# Altium PCB Controller-Board.PcbDoc
Units mil, origin at the board's own origin, x right, y up, seen from the top; angles counter-clockwise.
Board outline 1377.95 x 1181.1 mil, 2 copper layers (Component Side, Bottom Layer), stack 12.8 mil thick; 36 components, 50 nets, 202 pads, 55 vias.
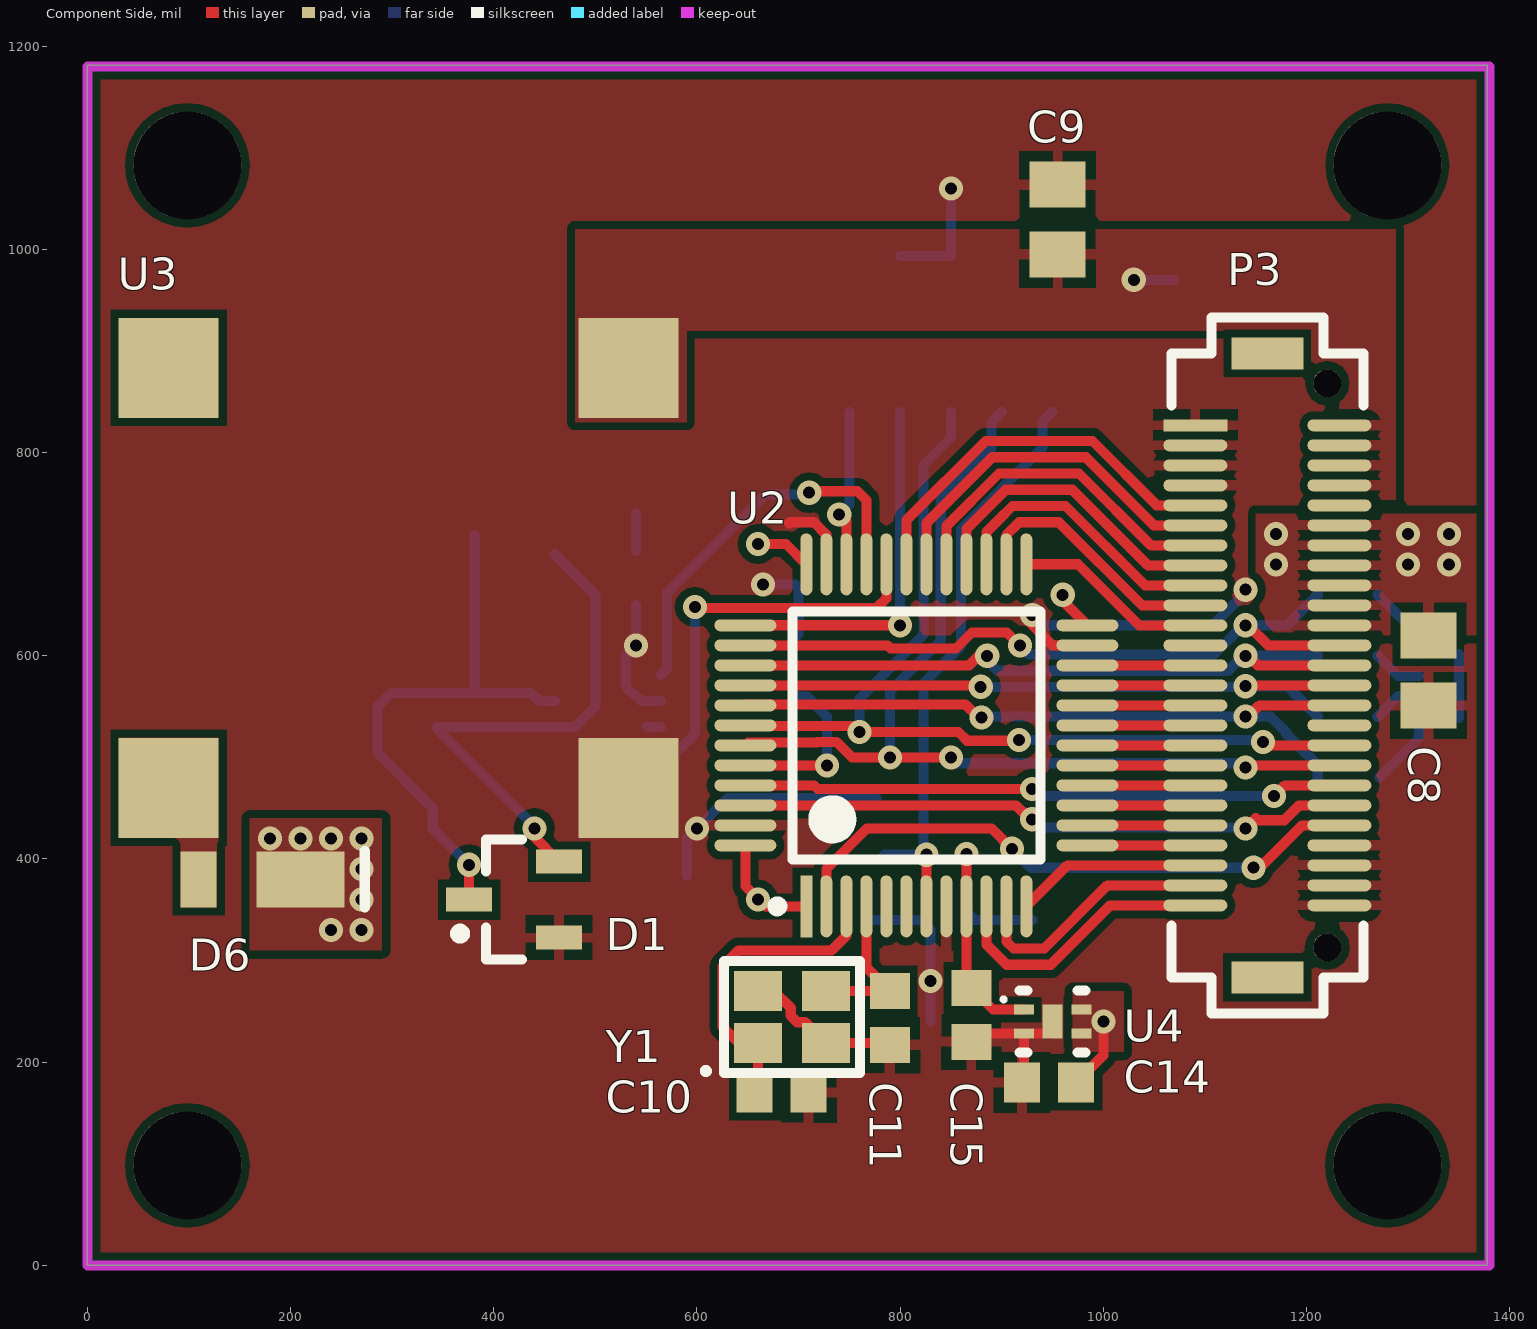
[diagram p0: Component Side view]
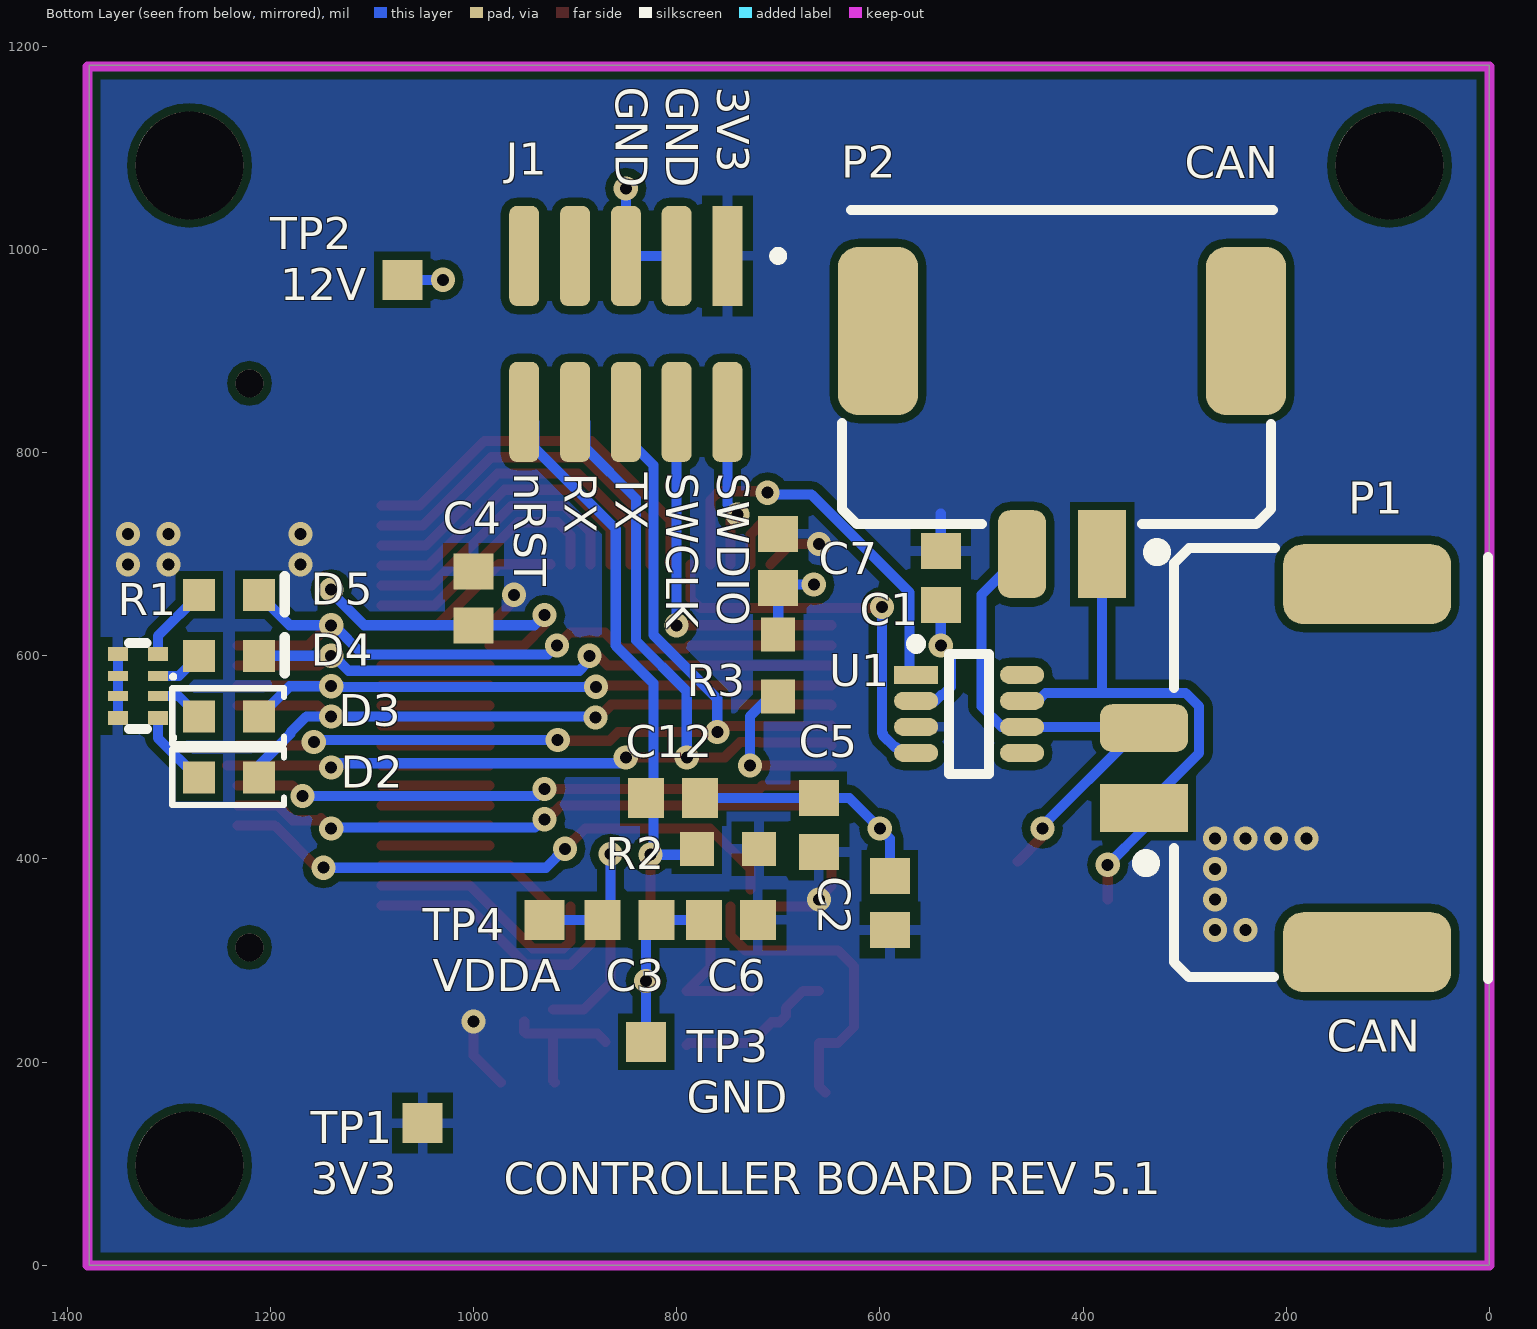
[diagram p1: Bottom Layer view, seen from below]
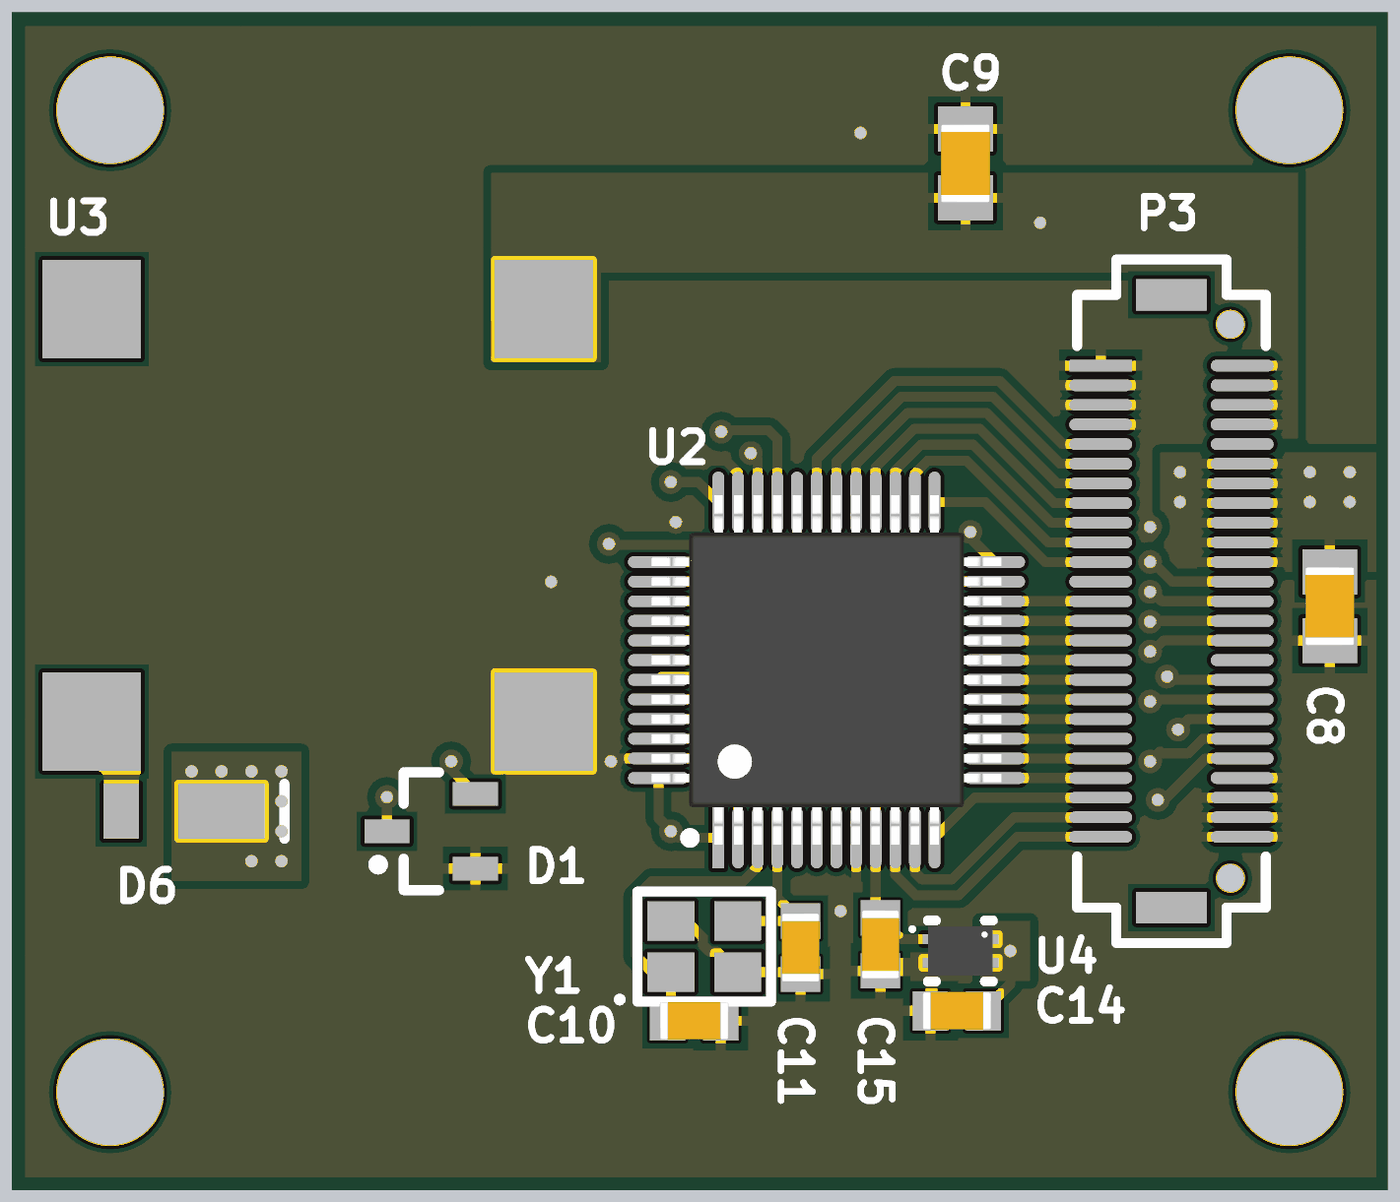
[diagram p2: 3D render of the assembled board from above, using the file's embedded part models]
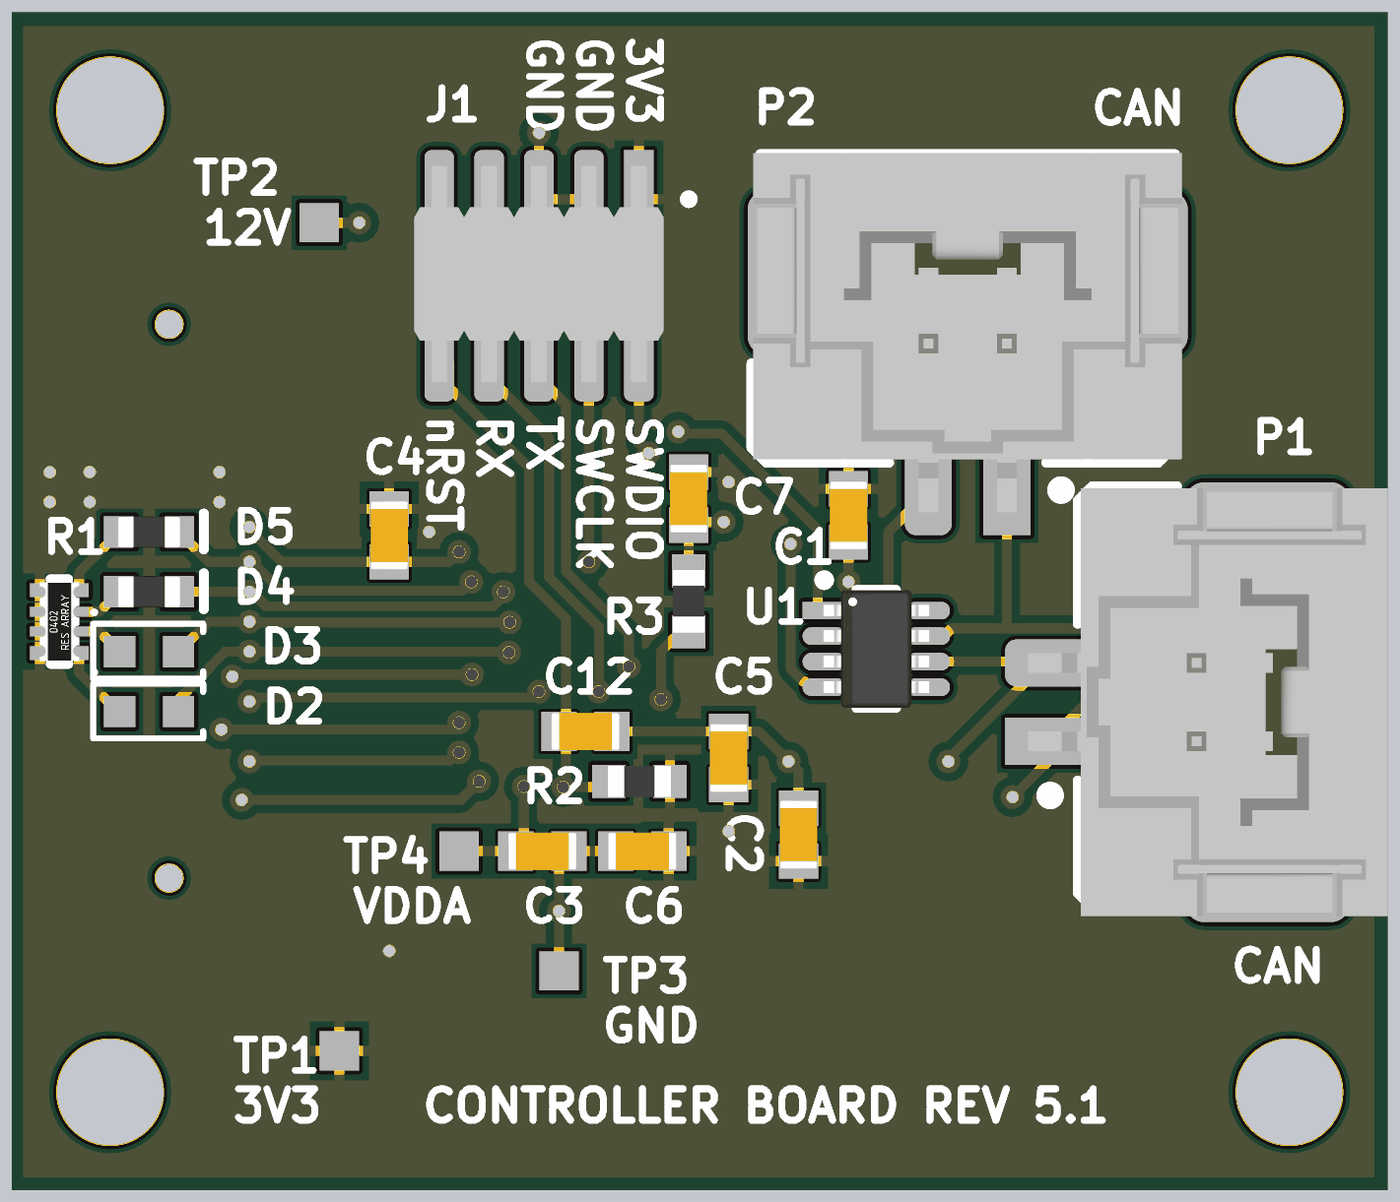
[diagram p3: 3D render of the assembled board from below, using the file's embedded part models]

## Layer stack, top to bottom
Top Solder: solder mask 0.4, Solder Resist, Dk 3.5
Component Side: signal copper 1.4
Dielectric 1: core 10, FR-4, Dk 4.2
Bottom Layer: signal copper 1.4
Solder Side: solder mask 0.4, Solder Resist, Dk 3.5

## Board outline
0,0 1377.95,0 1377.95,1181.1 0,1181.1

## Design rules (kind name [scope] priority, off if disabled: settings)
Clearance [All] p1: gap=6 except(5.98: Track-Track; 7.87: Arc-Poly Track-Poly SMDPad-Poly THPad-Poly Via-Poly Fill-Poly Poly-Poly Poly-Region Poly-Text)
DiffPairsRouting [All] p1: maxlimit=10 minlimit=10 mostfreqgap=10 toplayer_minwidth=10 toplayer_maxwidth=15 toplayer_prefwidth=10 bottomlayer_minwidth=10 bottomlayer_maxwidth=15 bottomlayer_prefwidth=10 maxuncoupledlength=984.25
HoleSize [All] p1: absolutevalues=TRUE maxlimit=118.11 minlimit=1 maxpercent=80.000 minpercent=20.000
MinimumSolderMaskSliver [All] p1: minsoldermaskwidth=0
PlaneClearance [All] p1: clearance=15.75
PlaneConnect [All] p1: planeconnectstyle=Direct reliefexpansion=0 reliefentries=4 reliefconductorwidth=10 reliefairgap=10
PolygonConnect PolygonConnect_LDO [HasFootprint('IC REG LDO 3V 0.2A 4-TDFN') OR HasFootprint('DIODE SCHOTTKY 30V 1A POWERDI123')OR HasFootprint('IC DCDC 3.3V 0.5A 4-SMD')] p1: connectstyle=Direct reliefconductorwidth=10 reliefentries=4 polygonreliefangle="90 Angle" airgapwidth=10
PolygonConnect [IsPad] p2: connectstyle=Relief reliefconductorwidth=10 reliefentries=4 polygonreliefangle="90 Angle" airgapwidth=10
PolygonConnect PolygonConnect_Via [Not(IsPad)] p3: connectstyle=Direct reliefconductorwidth=10 reliefentries=4 polygonreliefangle="90 Angle" airgapwidth=10
RoutingVias [All] p1: holewidth=11.81 width=23.81 viastyle="Through Hole" minholewidth=11.81 minwidth=23.81 maxholewidth=248.03 maxwidth=260.03
SilkToSilkClearance [All] p1: silktosilkclearance=5.91
SilkToSolderMaskClearance [IsPad] p1: minsilkscreentomaskgap=5.91 clearancetoexposedcopper=TRUE
SolderMaskExpansion [All] p1: expansion=4
Width [All] p1: maxlimit=50 minlimit=6 preferedwidth=8
23 further rules are at their usual default settings.

## Classes and differential pairs
component class Controller_Board_Power_Supply: C14 C15 D6 TP1 TP2 TP3 TP4 U3 U4 VIN
component class Controller_Board_Main: C1 C2 C3 C4 C5 C6 C7 C8 C9 C10 C11 C12 D1 D2 D3 D4 D5 J1 P1 P2 P3 R1 R2 R3 U1 U2 Y1
differential pair CAN: +CAN_P -CAN_N

## Components (designator, comment, footprint, x,y, rotation, side; value= is the part's Value field where it differs from the comment)
C1 "CAP CER 4.7UF 25V 10% X5R 0603" "CAP, 0603" 540,676.57 r90 bottom
C2 "CAP CER 0.1UF 50V 10% X7R 0603" "CAP, 0603" 590,356.57 r270 bottom
C3 "CAP CER 0.1UF 50V 10% X7R 0603" "CAP, 0603" 846.57,340 r0 bottom
C4 "CAP CER 0.1UF 50V 10% X7R 0603" "CAP, 0603" 1000,656.57 r90 bottom
C5 "CAP CER 0.1UF 50V 10% X7R 0603" "CAP, 0603" 660,433.43 r270 bottom
C6 "CAP CER 0.1UF 50V 10% X7R 0603" "CAP, 0603" 746.57,340 r180 bottom
C7 "CAP CER 0.1UF 50V 10% X7R 0603" "CAP, 0603" 700,693.43 r90 bottom
C8 "CAP CER 10uF 25V 10% X5R 0805" "CAP, 0805" 1320,585.55 r270 top
C9 "CAP CER 10uF 25V 10% X5R 0805" "CAP, 0805" 955,1029.45 r90 top
C10 "CAP CER 15PF 50V ±5% NPO 0603" "CAP, 0603" 683.43,170 r180 top
C11 "CAP CER 15PF 50V ±5% NPO 0603" "CAP, 0603" 790,243.43 r90 top
C12 "CAP CER 0.1UF 50V 10% X7R 0603" "CAP, 0603" 803.43,460 r0 bottom
C14 "CAP CER 1UF 50V 10% X7R 0603" "CAP, 0603" 946.57,180 r180 top
C15 "CAP CER 1UF 50V 10% X7R 0603" "CAP, 0603" 870,246.57 r270 top
D1 "DIODE TVS 24VWM 70VC SOT23" SOT23 420,360 r180 top
D2 "LED BLUE CLEAR 2.8V 0603" DIOC1608X06N 1240.47,480 r180 bottom
D3 "LED BLUE CLEAR 2.8V 0603" DIOC1608X06N 1240.47,540 r180 bottom
D4 "LED GREEN CLEAR 2V 0603" LED_0603 1268.03,599.61 r180 bottom
D5 "LED RED CLEAR 2V 0603" LED_0603 1268.03,659.61 r180 bottom
D6 "DIODE SCHOTTKY 30V 1A POWERDI123" "DIODE SCHOTTKY 30V 1A POWERDI123" 109.61,380 r0 top
J1 "CONN 10POS HEADR MALE 0.05\"" "CONN, 10POS 0.05\" Debug Header" 750,993.54 r0 bottom
P1 "Dura-Clik" "CONN, 2POS Dura-Click Vertical" 340,450 r90 bottom
P2 "Dura-Clik" "CONN, 2POS Dura-Click Vertical" 381.26,700 r0 bottom
P3 "CONN 50POS Bergstak Receptacle 0.02\"" "CONN, Bergstak 50 Pos Receptacle" 1161.42,590.55 r0 top locked
R1 "RES ARRAY 510 OHM 5% 4RES" "RES ARRAY 4 POS 0804" 1369.69,580 r0 bottom
R2 "RES 100K OHM 5% 1/8W 0603" "RES, 0603" 749.49,410 r180 bottom
R3 "RES 510 OHM 5% 1/10W 0603" "RES, 0603" 700,590.51 r270 bottom
TP1 "Test Point" "Test Point" 1050,140 r90 bottom
TP2 "Test Point" "Test Point" 1070,970 r90 bottom
TP3 "Test Point" "Test Point" 830,220 r90 bottom
TP4 "Test Point" "Test Point" 930,340 r90 bottom
U1 "IC CAN Tranceiver TCAN332DR" TSOP65P280X145-8N 512.17,542.8 r180 bottom
U2 "IC MCU 32BIT 128KB FLASH 48LQFP" TSQFP50P890X890X160-48M 815.94,521.65 r90 top locked
U3 "IC DCDC 3.3V 0.5A 4-SMD" "IC DCDC 3.3V 0.5A 4-SMD" 532.76,883.39 r270 top
U4 "IC REG LDO 3V 0.2A 4-TDFN" "IC REG LDO 3V 0.2A 4-TDFN" 921.85,251.81 r270 top
Y1 "CRYSTAL 32 MHz 8pF 4-SMD" "CX2520DB CRYSTAL" 660,218.82 r0 top

## Footprints (in the part's own frame and the unit in brackets; to place one, negate y for a bottom-side part, rotate by r counter-clockwise, add the part's x,y. Pads: shape width x height; smd on the part's side, far side on the other; paste and mask are expansions set on the pad)
"CAP, 0603" [mm] "Chip Capacitor, 2-Leads, Body 1.60x0.81mm, IPC Medium Density"
  rect 0.9x1 smd mask+0.076: 1(-0.675,0) 2(0.675,0)
  body extent -0.87,-0.48 0.88,0.48, height 0.9
"CAP, 0805" [mm] "Chip Capacitor, 2-Leads, Body 2.00x1.25mm, IPC Medium Density"
  rect 1.15x1.4 smd: 1(-0.875,0) 2(0.875,0)
  body extent -1,-0.63 1,0.63, height 1.25
"CONN, 2POS Dura-Click Vertical" [mm] "WM7169CT-ND"
  rect 1.2x2.2 smd: 1(0,0)
  rrect50% 1.2x2.2 smd: 2(2,0)
  rrect50% 2x4.2 smd: 3(-3.6,-5.58) 3(5.6,-5.58)
  silkscreen extent -4.28,-8.6 6.5,0.05, body extent -4.45,-8.64 6.45,0.51, height 8
"CONN, 10POS 0.05\" Debug Header" [mm] "Amphenol 10 Positions Header Connector 0.050\" (1.27mm) Surface Mount Gold"
  rect 0.75x2.5 smd: 1(0,0)
  rrect50% 0.75x2.5 smd: 2(0,3.9) 3(1.27,0) 4(1.27,3.9) 5(2.54,0) 6(2.54,3.9) 7(3.81,0) 8(3.81,3.9) 9(5.08,0) 10(5.08,3.9)
  silkscreen extent -1.37,-0.1 -1.17,0.1, body extent -0.63,-0.85 5.72,4.65, height 4.5
"CONN, Bergstak 50 Pos Receptacle" [mm] "Bergstak 50 Position Receptacle"
  rect 1.6x0.3 smd: 1(-1.8,6)
  oval 1.6x0.3 smd: 2(-1.8,5.5) 3(-1.8,5) 4(-1.8,4.5) 5(-1.8,4) 6(-1.8,3.5) 7(-1.8,3) 8(-1.8,2.5) 9(-1.8,2) 10(-1.8,1.5) 11(-1.8,1) 12(-1.8,0.5) 13(-1.8,0) 14(-1.8,-0.5) 15(-1.8,-1) 16(-1.8,-1.5) 17(-1.8,-2) 18(-1.8,-2.5) 19(-1.8,-3) 20(-1.8,-3.5) 21(-1.8,-4) 22(-1.8,-4.5) 23(-1.8,-5) 24(-1.8,-5.5) 25(-1.8,-6) 26(1.8,-6) 27(1.8,-5.5) 28(1.8,-5) 29(1.8,-4.5) 30(1.8,-4) 31(1.8,-3.5) 32(1.8,-3) 33(1.8,-2.5) 34(1.8,-2) 35(1.8,-1.5) 36(1.8,-1) 37(1.8,-0.5) 38(1.8,0) 39(1.8,0.5) 40(1.8,1) 41(1.8,1.5) 42(1.8,2) 43(1.8,2.5) 44(1.8,3) 45(1.8,3.5) 46(1.8,4) 47(1.8,4.5) 48(1.8,5) 49(1.8,5.5) 50(1.8,6)
  rect 1.8x0.8 smd: ""(0,-7.8) ""(0,7.8)
  round 0.7 hole 0.7: ""(1.5,-7.05) ""(1.5,7.05)
  silkscreen extent -2.4,-8.7 2.4,8.7
"CX2520DB CRYSTAL" [mm]
  rect 1.2x1 smd: 1(0,0) 2(1.7,0) 3(1.7,1.3) 4(0,1.3)
  silkscreen extent -1.35,-0.75 2.55,2.05, body extent -0.4,-0.35 2.1,1.65, height 0.5
DIOC1608X06N [mm] "Chip Diode, 2-Leads, Body 1.60x0.80mm, IPC Medium Density"
  rect 0.8x0.8 smd: 1(-0.75,0) 2(0.75,0)
  silkscreen extent -1.45,-0.69 1.38,1.05, body extent -0.8,-0.4 0.8,0.4, height 0.8
"DIODE SCHOTTKY 30V 1A POWERDI123" [mm] "Diodes Incorporated DFLS130L-7"
  rect 0.9x1.4 smd: 1(0,0)
  rect 2.2x1.4 smd: 2(2.55,0)
  silkscreen extent 4.15,-0.7 4.15,0.7, body extent 0.1,-1 3.1,1, height 1
"IC DCDC 3.3V 0.5A 4-SMD" [mm] "ROF-78E3.3-0.5SMD-R"
  rect 2.5x2.5 smd: 1(0,0) 2(10.5,0) 3(10.5,-11.5) 4(0,-11.5)
  body extent -1,-12.5 11.5,1, height 4
"IC REG LDO 3V 0.2A 4-TDFN" [mm] "QFN, 4-Leads, Body 1.20x1.60mm, Pitch 0.50mm/1.40mm, Thermal Pad 0.86x0.50mm, IPC Medium Density"
  rect 0.25x0.5 smd: 1(0,0) 2(0.6,0) 3(0.6,1.44) 4(0,1.44)
  rect 0.86x0.5 smd: 5(0.3,0.715)
  silkscreen extent -0.48,-0.56 1.07,1.54, body extent -0.33,-0.11 0.92,1.54, height 0.6
LED_0603 [mm]
  rect 0.8x0.8 smd: 1(-0.05,0.01) 2(1.45,0.01)
  silkscreen extent 2.09,-0.43 2.09,0.48, body extent -0.1,-0.39 1.5,0.41, height 0.55
"RES ARRAY 4 POS 0804" [mm] "Panasonic Electronic Components EXB-N8V511JX"
  rect 0.5x0.35 smd: 1(-1.5,1.05) 4(-1.5,-0.55) 5(-0.5,-0.55) 8(-0.5,1.05)
  rect 0.5x0.25 smd: 2(-1.5,0.5) 3(-1.5,0) 6(-0.5,0) 7(-0.5,0.5)
  silkscreen extent -1.22,-0.82 -0.77,1.33, body extent -1.5,-0.75 -0.5,1.25, height 0.36
"RES, 0603" [mm] "Chip Resistor, 2-Leads, Body 1.60x0.80mm, IPC Medium Density"
  rect 0.85x0.85 smd: 1(-0.775,0) 2(0.775,0)
  body extent -0.8,-0.4 0.8,0.4, height 0.55
SOT23 [mm] "SOT23, 3-Leads, Body 2.9x1.3mm, Pitch 0.95mm, Lead Span 2.3mm - Reverse Pinning, IPC Medium Density"
  rect 1.15x0.6 smd: 1(1.125,0) 2(-1.125,-0.95) 3(-1.125,0.95)
  silkscreen extent -0.2,-1.5 1.47,1.5, body extent -0.7,-1.5 0.7,1.5, height 1.1
"Test Point" [mm]
  rect 1x1 smd: TP(0,0)
TSOP65P280X145-8N [mm] "TSOP, 8-Leads, Body 2.90x1.60mm, Pitch 0.65mm, IPC Medium Density"
  rect 1.1x0.45 smd: 1(-1.325,0.975)
  oval 1.1x0.45 smd: 2(-1.325,0.325) 3(-1.325,-0.325) 4(-1.325,-0.975) 5(1.325,-0.975) 6(1.325,-0.325) 7(1.325,0.325) 8(1.325,0.975)
  silkscreen extent -1.45,-1.5 0.5,1.87, body extent -1.39,-1.5 1.39,1.5, height 1.45
TSQFP50P890X890X160-48M [mm] "TSQFP, 48-Leads, Body 7.00x7.00mm, Pitch 0.50mm, IPC Low Density"
  rect 1.55x0.3 smd: 1(-4.275,2.75)
  oval 1.55x0.3 smd: 2(-4.275,2.25) 3(-4.275,1.75) 4(-4.275,1.25) 5(-4.275,0.75) 6(-4.275,0.25) 7(-4.275,-0.25) 8(-4.275,-0.75) 9(-4.275,-1.25) 10(-4.275,-1.75) 11(-4.275,-2.25) 12(-4.275,-2.75) 25(4.275,-2.75) 26(4.275,-2.25) 27(4.275,-1.75) 28(4.275,-1.25) 29(4.275,-0.75) 30(4.275,-0.25) 31(4.275,0.25) 32(4.275,0.75) 33(4.275,1.25) 34(4.275,1.75) 35(4.275,2.25) 36(4.275,2.75)
  oval 0.3x1.55 smd: 13(-2.75,-4.275) 14(-2.25,-4.275) 15(-1.75,-4.275) 16(-1.25,-4.275) 17(-0.75,-4.275) 18(-0.25,-4.275) 19(0.25,-4.275) 20(0.75,-4.275) 21(1.25,-4.275) 22(1.75,-4.275) 23(2.25,-4.275) 24(2.75,-4.275) 37(2.75,4.275) 38(2.25,4.275) 39(1.75,4.275) 40(1.25,4.275) 41(0.75,4.275) 42(0.25,4.275) 43(-0.25,4.275) 44(-0.75,4.275) 45(-1.25,4.275) 46(-1.75,4.275) 47(-2.25,4.275) 48(-2.75,4.275)
  silkscreen extent -4.4,-3.1 3.1,3.6, body extent -4.45,-4.45 4.45,4.45, height 1.6

## Part data
C1: "4.7µF ±10% 25V Ceramic Capacitor X5R 0603 (1608 Metric)"
C2 C3 C4 C5 C6 C7 C12: "0.10µF ±10% 50V Ceramic Capacitor X7R 0603 (1608 Metric)"
C8 C9: "10µF ±10% 25V Ceramic Capacitor X5R 0805 (2012 Metric)"
C10 C11: "15pF ±5% 50V Ceramic Capacitor C0G, NP0 0603 (1608 Metric)"
C14 C15: "1µF ±10% 50V Ceramic Capacitor X7R 0603 (1608 Metric)"
D1: "TVS DIODE 24VWM 70VC SOT23"
D2 D3: "Blue 470nm LED Indication - Discrete 2.8V 0603 (1608 Metric)"
D4: "Green 572nm LED Indication - Discrete 2V 0603 (1608 Metric)"
D5: "Red 631nm LED Indication - Discrete 2V 0603 (1608 Metric)"
D6: "Diode Schottky 30V 1A Surface Mount PowerDI™ 123"
J1: "10 Positions Header Connector 0.050\" (1.27mm) Surface Mount Gold"
P1 P2: library part "CONN 2POS DURA-CLIK 0.079\" VERT", "2 Positions Header, Shrouded Connector 0.079\" (2.00mm) Surface Mount, Vertical Tin"
P3: "50 Position Connector Receptacle, Center Strip Contacts Surface Mount Gold"
R1: library part "RES ARRAY 510 OHM 5% 4RES EXB-N8V511JX", "RES ARRAY SMD 510 OHM 5% 4RES EXB-N8V511JX"
R2: "RES SMD 100K OHM 5% 1/10W 0603"
R3: "RES SMD 510 OHM 5% 1/10W 0603"
U1: "1/1 Transceiver CAN 8-SOIC"
U2: "ARM® Cortex®-M0 STM32 F0 Microcontroller IC 32-Bit 48MHz 128KB (128K x 8) FLASH 48-LQFP (7x7)"
U3: "Non-isolated PoL DC-DC Module 3.3V Output 0.5A 5-36V Input"
Y1: "32MHz ±15ppm Crystal 8pF 50 Ohm -40°C ~ 85°C AEC-Q200 Surface Mount 4-SMD, No Lead"

## Free pads (board coordinates)
  round 106.3 hole 106.3: ""(98.42,98.43) ""(98.42,1082.68) ""(1279.53,98.43) ""(1279.53,1082.68)

## Via types
v1: diameter 23.81, hole 11.81, Component Side to Bottom Layer, tented both sides, 41 vias
v2: diameter 23.62, hole 11.81, Component Side to Bottom Layer, tented both sides, 14 vias

## Nets (pads, with @x,y where several pads share a name; then routed paths per layer and width w, separated by ;. In a path a pad name is that pad's centre, name@x,y a point inside that pad or via, vN(x,y) a via of type N, cw(c..) or ccw(c..) an arc to the next point about the centre after c; other vN are vias at no path point)
3V3: C1.2 C2.2 C4.2 C5.2 C6.2 C7.2 C8.1 C14.1 D6.2 J1.1 P3.40 P3.41 P3.42 P3.43 P3.44 P3.45 R1.5 R1.6 R1.7 R1.8 R2.2 TP1.TP U1.3 U2.1 U2.24 U2.36 U2.48 U4.3 U4.4 | length 390.3
  Component Side w10: U2.48 647.64,373.31 v1@660,360.94 ; v1(660,360) v1@660,360.94 ; v1(660,710) 687.64,710 U2.36 ; U2.1 667.6,353.35 v1@660,360.94 ; v1(960,660) 960,654.17 U2.24 ; C14.1 1000,206.85 v1(1000,240)
  Bottom Layer w10: C1.2 540,740 ; U1.3@550.46,530 U1.3 ; R1.8 R1.7 R1.6 R1.5
  other v2: 240,330 270,330 270,360 270,390 180,420 210,420 240,420 270,420 1170,690 1300,690 1340,690 1170,720 1300,720 1340,720
12V: C9.1 P3.47 P3.48 P3.49 P3.50 TP2.TP U3.1 | length 40
  Bottom Layer w10: v1(1030,970) TP2.TP
BOOT0: R3.2 U2.44 | length 164.4
  Component Side w10: U2.44 v1(727.87,492.13)
  Bottom Layer w10: R3.2 708.1,560 727.87,540.22 v1(727.87,492.13)
CAN_N: D1.2 P1.2 P2.2 U1.6 | length 512.4
  Component Side w10: v1(440,430) 440,421.69 D1.2
  Bottom Layer w10: P1.2@343.75,528.74 350.61,521.87 440,432.49 v1(440,430) ; P1.2@343.75,530 U1.6 480,530 500,550 500,660 P2.2
CAN_P: D1.1 P1.1 P2.1 U1.7 | length 565.7
  Component Side w10: D1.1 v1(375.71,394.29)
  Bottom Layer w10: v1(375.71,394.29) 340,430 P1.1 285.69,504.31 285.69,550 299.06,563.36 381.26,563.36 ; P2.1@381.26,718.74 P2.1 381.26,563.36 ; U1.7 444.71,555.59 436.94,563.36 381.26,563.36
GND: C1.1 C2.1 C3.1 C4.1 C5.1 C6.1 C7.1 C8.2 C9.2 C10.1 C11.1 C12.1 C14.2 C15.2 D1.3 J1.3 J1.5 P3.1 P3.2 P3.3 P3.4 P3.26 P3.27 P3.28 P3.29 R3.1 TP3.TP U1.2 U2.8 U2.23 U2.35 U2.47 U3.2 U4.2 U4.5 Y1.2 Y1.4 | length 1387.9
  Component Side w10: Y1.4 675.75,270 692.31,253.44 692.31,245.76 698.75,239.31 706.43,239.31 Y1.2 788.03,218.82 C11.1 ; 690.47,730.47 691.47,731.47 715.13,731.47 727.36,719.24 U2.35 ; C15.2 878.19,228.19 U4.2 ; C14.2 921.85,181.85 U4.2 ; v1(930,640) 930,630.23 950,610.24 U2.23 ; U4.5 950,230 948.19,228.19 U4.2
  Bottom Layer w10: C1.1 v1(540,610) 530,600 530,569.44 538.12,561.32 539.54,561.32 545.27,555.59 U1.2 ; C2.1@590,383.58 590,420 v1(600,430) 630,460 C5.1 C12.1 ; v1(665,670) 696.85,670 C7.1 R3.1 ; C6.1 C3.1 830,330 v1(830,280) 830,240 ; J1.3 J1.5 v1(850,1060) ; v1(930,640) 940,630 C4.1 1107.61,630 1140,662.39 v1(1140,665)
NetD2_1: D2.1 R1.1 | length 74.3
  Bottom Layer w10: D2.1@1271.97,480.39 1310.63,519.06 R1.1
NetD3_1: D3.1 R1.2 | length 49
  Bottom Layer w10: D3.1 1290.32,560.32 R1.2
NetD4_1: D4.1 R1.3 | length 48.9
  Bottom Layer w10: D4.1 1290,580 R1.3
NetD5_1: D5.1 R1.4 | length 75.2
  Bottom Layer w10: D5.1 1310.63,619.37 R1.4
NetD6_1: D6.1 U3.3
NRST: C12.2 J1.10 R2.1 U2.7 | length 581.6
  Component Side w10: U2.7 v1(825.79,404.21)
  Bottom Layer w10: R2.1@784.72,404.21 v1(825.79,404.21) 822.91,407.09 822.91,572.91 860,610 860,724.79 940,804.79 940,830 J1.10
PA0: P3.25 U2.10 | length 275.7
  Component Side w10: U2.10 884.84,315.91 904.91,295.85 948.38,295.85 1006.86,354.33 P3.25
PA1: P3.24 U2.11 | length 249.2
  Component Side w10: U2.11 904.53,318.83 911.53,311.83 941.76,311.83 1003.94,374.02 P3.24
PA2/USART2_TX: P3.23 U2.12 | length 183.1
  Component Side w10: U2.12 964.57,393.7 P3.23
PA3/USART2_RX: P3.22 U2.13 | length 106.3
  Component Side w10: U2.13 1018.76,413.39 P3.22
PA4/SPI1_NSS: P3.21 U2.14 | length 106.3
  Component Side w10: U2.14 1018.76,433.07 ; 1018.76,433.07 P3.21
PA5/SPI1_SCK: P3.20 U2.15 | length 106.3
  Component Side w10: U2.15 1018.76,452.76 P3.20
PA6/SPI1_MISO: P3.19 U2.16 | length 106.3
  Component Side w10: U2.16 1018.76,472.44 P3.19
PA7/SPI1_MOSI: P3.18 U2.17 | length 106.3
  Component Side w10: U2.17 1018.76,492.13 P3.18
PA8: P3.7 U2.29 | length 333.5
  Component Side w10: U2.29 845.47,727.55 897.35,779.43 976,779.43 1046.76,708.66 P3.7
PA9: P3.6 U2.30 | length 360
  Component Side w10: U2.30 825.79,730.47 890.73,795.41 982.62,795.41 1049.68,728.35 P3.6
PA10: P3.5 U2.31 | length 386.4
  Component Side w10: U2.31 806.1,733.39 884.11,811.39 989.24,811.39 1052.6,748.03 P3.5
PA11/CAN_RX: U1.4 U2.32 | length 392.7
  Component Side w10: v1(597.99,647.99) 598.89,647.09 777.09,647.09 786.42,656.42 U2.32
  Bottom Layer w10: U1.4 578.2,504.41 583.93,510.14 585.35,510.14 596.98,521.77 596.98,523.19 597.99,524.2 v1(597.99,647.99)
PA12/CAN_TX: U1.1 U2.33 | length 387.8
  Component Side w10: v1(710.49,760.49) 711.91,761.91 758.09,761.91 766.73,753.27 U2.33
  Bottom Layer w10: U1.1 570.69,587.54 570.69,662.12 667.14,758.58 708.58,758.58 v1(710.49,760.49)
PA13/SWDIO: J1.2 U2.34 | length 159.1
  Component Side w10: v1(740,739) 740,740 747.05,732.95 U2.34
  Bottom Layer w10: v1(740,739) 750,749 J1.2
PA14/SWCLK: J1.4 U2.37 | length 362.4
  Component Side w10: U2.37 647.72,630 v1(800,630)
  Bottom Layer w10: v1(800,630) J1.4
PA15: D5.2 P3.39 U2.38 | length 704.9
  Component Side w10: U2.38 787.37,610.24 790.51,607.09 854.96,607.09 870.76,622.89 904.95,622.89 v1(917.84,610) ; v1(1140,630) 1142.39,630 1162.16,610.24 P3.39
  Bottom Layer w10: v1(917.84,610) 926.56,601.28 1108.89,601.28 1137.61,630 v1(1140,630) 1180.94,630 D5.2
PB0: P3.17 U2.18 | length 106.3
  Component Side w10: U2.18 1055.06,511.81 P3.17
PB1: P3.16 U2.19 | length 106.3
  Component Side w10: U2.19 1055.06,531.5 P3.16
PB2: P3.15 U2.20 | length 106.3
  Component Side w10: U2.20 1055.06,551.18 P3.15
PB3: D4.2 P3.38 U2.39 | length 684.6
  Component Side w10: U2.39 867.98,590.55 877.42,599.98 v1(885.7,599.98) ; v1(1140,600) 1142.39,600 1151.84,590.55 P3.38
  Bottom Layer w10: v1(885.7,599.98) 881.17,599.98 888.78,592.37 895.85,585.3 1122.91,585.3 1137.61,600 v1(1140,600) D4.2
PB4: D3.2 P3.37 U2.40 | length 670.6
  Component Side w10: U2.40 879.31,570.87 v1(879.29,569.47) ; v1(1140,570) 1140.87,570.87 P3.37
  Bottom Layer w10: v1(879.29,569.47) 879.83,570 888.55,570 889.23,569.31 1129.53,569.31 1130.21,570 v1(1140,570) 1180.94,570 D3.2
PB5: D2.2 P3.36 U2.41 | length 699
  Component Side w10: U2.41 648.36,551.91 864.46,551.91 877.17,539.19 v1(880,539.19) ; v1(1140,540.16) 1142.55,540.16 1153.57,551.18 P3.36
  Bottom Layer w10: v1(880,539.19) 881.41,539.19 882.38,540.16 v1(1140,540.16) 1164.39,540.16 1179.99,524.57 1179.99,523.15 1210.94,492.19 D2.2
PB6/USART1_TX: J1.6 P3.34 U2.42 | length 951.6
  Component Side w10: U2.42 648.12,531.02 758.98,531.02 760,530 v1(760,525) 857.39,525 866.1,516.29 916.29,516.29 v1(917.09,517.09) ; v1@1157.08,515.02 v1(1157.08,515.08) ; v1@1160,515.03 1157.13,515.03 1160.35,511.81 P3.34
  Bottom Layer w10: v1(760,525) 760,557.61 822.91,620.51 822.91,787.7 850,814.79 J1.6 ; v1(917.09,517.09) 1155.06,517.09 v1(1157.08,515.08)
PB7/USART1_RX: J1.8 P3.33 U2.43 | length 992.8
  Component Side w10: U2.43 650.42,514.59 717.95,514.59 718.39,515.03 737.36,515.03 737.8,514.59 738.02,514.59 752.61,500 v1(790,500) v1(850,500) ; v1(1140,490) 1142.13,492.13 P3.33 P3.33@1242.28,492.13
  Bottom Layer w10: v1(790,500) 790,565 840,615 840,754.79 890,804.79 890,830 J1.8 ; v1(850,500) 855.81,494.19 1135.81,494.19 v1(1140,490)
PB8/I2C1_SCL: P3.32 U2.45 | length 593.4
  Component Side w10: U2.45 715.17,472.44 718.73,468.88 v1(930,468.88) ; v1(1168.09,461.91) 1178.63,472.44 P3.32
  Bottom Layer w10: v1(930,468.88) 936.91,461.97 939.49,461.97 939.56,461.91 v1(1168.09,461.91)
PB9/I2C1_SDA: P3.31 U2.46 | length 603.9
  Component Side w10: U2.46 913.73,452.76 920.51,445.97 921.93,445.97 928.83,439.07 v1(930,439.07) ; v1(1140,430) 1150,440 1151.91,438.09 1178.09,438.09 1192.76,452.76 P3.31
  Bottom Layer w10: v1@931.17,439.07 939.26,430.98 1139.02,430.98 v1(1140,430)
PB10/USART3_TX/I2C2_SCL: P3.14 U2.21 | length 106.3
  Component Side w10: U2.21 P3.14
PB11/USART3_RX/I2C2_SDA: P3.13 U2.22 | length 106.3
  Component Side w10: U2.22 P3.13
PB12/SPI2_NSS: P3.11 U2.25 | length 191.2
  Component Side w10: U2.25 924.25,690 975,690 1035.08,629.92 P3.11
PB13/SPI2_SCK: P3.10 U2.26 | length 254
  Component Side w10: U2.26 904.53,718.79 917.21,731.47 956.13,731.47 1038,649.61 P3.10
PB14/SPI2_MISO: P3.9 U2.27 | length 280.5
  Component Side w10: U2.27 884.84,721.71 896.57,733.43 910.59,747.46 962.75,747.46 1040.92,669.29 P3.9
PB15/SPI2_MOSI: P3.8 U2.28 | length 307
  Component Side w10: U2.28 865.16,724.63 903.97,763.44 969.37,763.44 1043.84,688.98 P3.8
PC13: P3.30 U2.2 | length 574.8
  Component Side w10: U2.2@727.36,370 727.36,390.08 767.28,430 890,430 v1(910,410) ; v1(1147.72,391.37) 1153.97,391.37 1195.68,433.07 P3.30
  Bottom Layer w10: v1(910,410) 928.63,391.37 v1(1147.72,391.37)
PC14/OSC32_IN: C10.2 U2.3 Y1.1 | length 315.4
  Component Side w10: C10.2@653.43,170 660,176.57 Y1.1 641.18,218.82 625.38,234.62 625.38,294.24 641.14,310 732.53,310 747.05,324.52 U2.3
PC15/OSC32_OUT: C11.2 U2.4 Y1.3 | length 156.1
  Component Side w10: Y1.3 C11.2 766.73,293.27 U2.4
PF0/OSC_IN: U2.5
PF1/OSC_OUT: U2.6
VDDA: C3.2 C15.1 TP4.TP U2.9 U4.1 | length 319.4
  Component Side w10: v1(865.16,404.84) U2.9 865.16,277.99 C15.1 891.34,251.81 U4.1
  Bottom Layer w10: v1(865.16,404.84) 865.16,347.99 C3.2 TP4.TP
pads on no net: J1.7 J1.9 P1.3 P2.3 P3. P3.12 P3.35 P3.46 U1.5 U1.8 U3.4

## Polygon pours and split planes (outlines as drawn)
3V3 on Component Side "3V3_L01_P072" (solid, remove dead copper, pour order 72): 1020,210 970,210 970,270 1020,270
3V3 on Component Side "3V3_L01_P073" (solid, remove dead copper, pour order 73): 160,440 290,440 290,310 160,310
GND on Component Side "GND_L01_P076" (solid, remove dead copper, pour order 76): 0,1180 1370,1180 1380,1190 1380,0 0,0
12V on Component Side "12V_L01_P075" (solid, remove dead copper, pour order 75): 1200,753.41 1288.03,753.41 1288.03,1020 480,1020 480,830 590,830 590,920 1200,920
3V3 on Component Side "3V3_L01_P074" (solid, remove dead copper, pour order 74): 1150,620 1370,620 1370,740 1150,740
NetD6_1 on Component Side "NETD6_1_L01_P080" (solid, pour order 80): 20,520 140,520 140,350 20,350
3V3 on Bottom Layer "3V3_L02_P077" (solid, remove dead copper, pour order 77): 0,1190 10,1180 1380,1180 1380,0 0,0

## Keep-outs
Keep-Out Layer:
  lines w10: 0,0 0,1180 1380,1180 1380,0 0,0

## Silkscreen, mask and mechanical layers (free items; w line width, h text height)
Bottom Overlay:
  text "3V3" at 760,1160 h31.5 r90
  text "GND" at 810,1160 h31.5 r90
  text "GND" at 860,1160 h31.5 r90
  text "CAN" at 300,1070 h31.5
  text "12V" at 1190,950 h31.5
  text "SWDIO" at 760,780 h31.5 r90
  text "SWCLK" at 810,780 h31.5 r90
  text "TX" at 860,780 h31.5 r90
  text "RX" at 910,780 h31.5 r90
  text "nRST" at 960,780 h31.5 r90
  text "VDDA" at 1040,270 h31.5
  text "CAN" at 160,210 h31.5
  text "GND" at 790,150 h31.5
  text "CONTROLLER BOARD REV 5.1" at 970,70 h31.5
  text "3V3" at 1160,70 h31.5